# Altium PCB PCB_D1 mini AHT20 BMP150_2022-06-29.pcbdoc
Units mil, origin at the board's own origin, x right, y up, seen from the top; angles counter-clockwise.
Board outline 2302.5 x 2175 mil, 2 copper layers (Top Layer, Bottom Layer); 17 components, 27 nets, 76 pads, 4 vias.
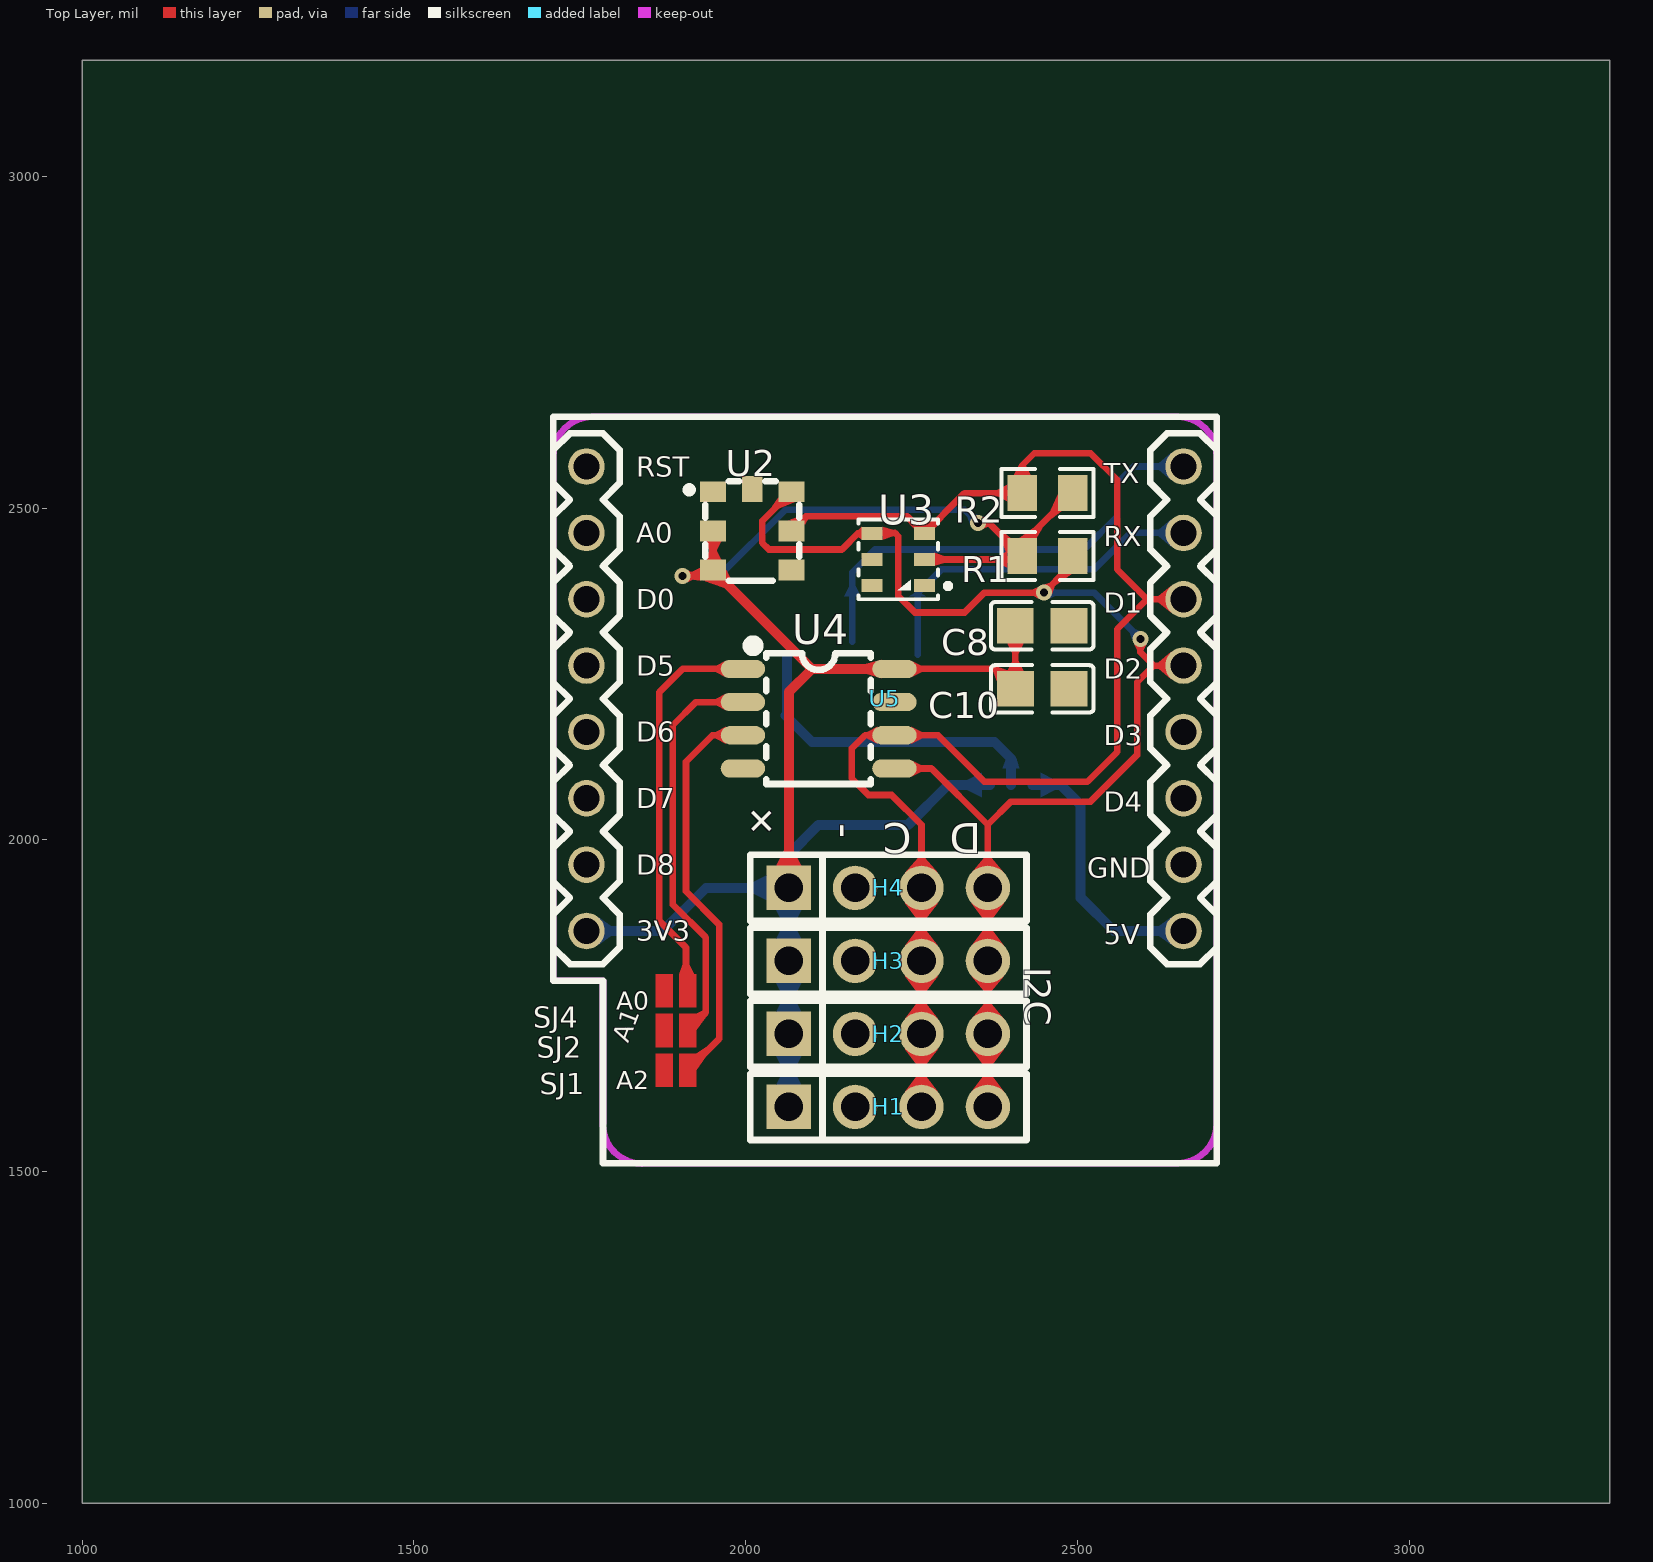
[diagram p0: Top Layer view]
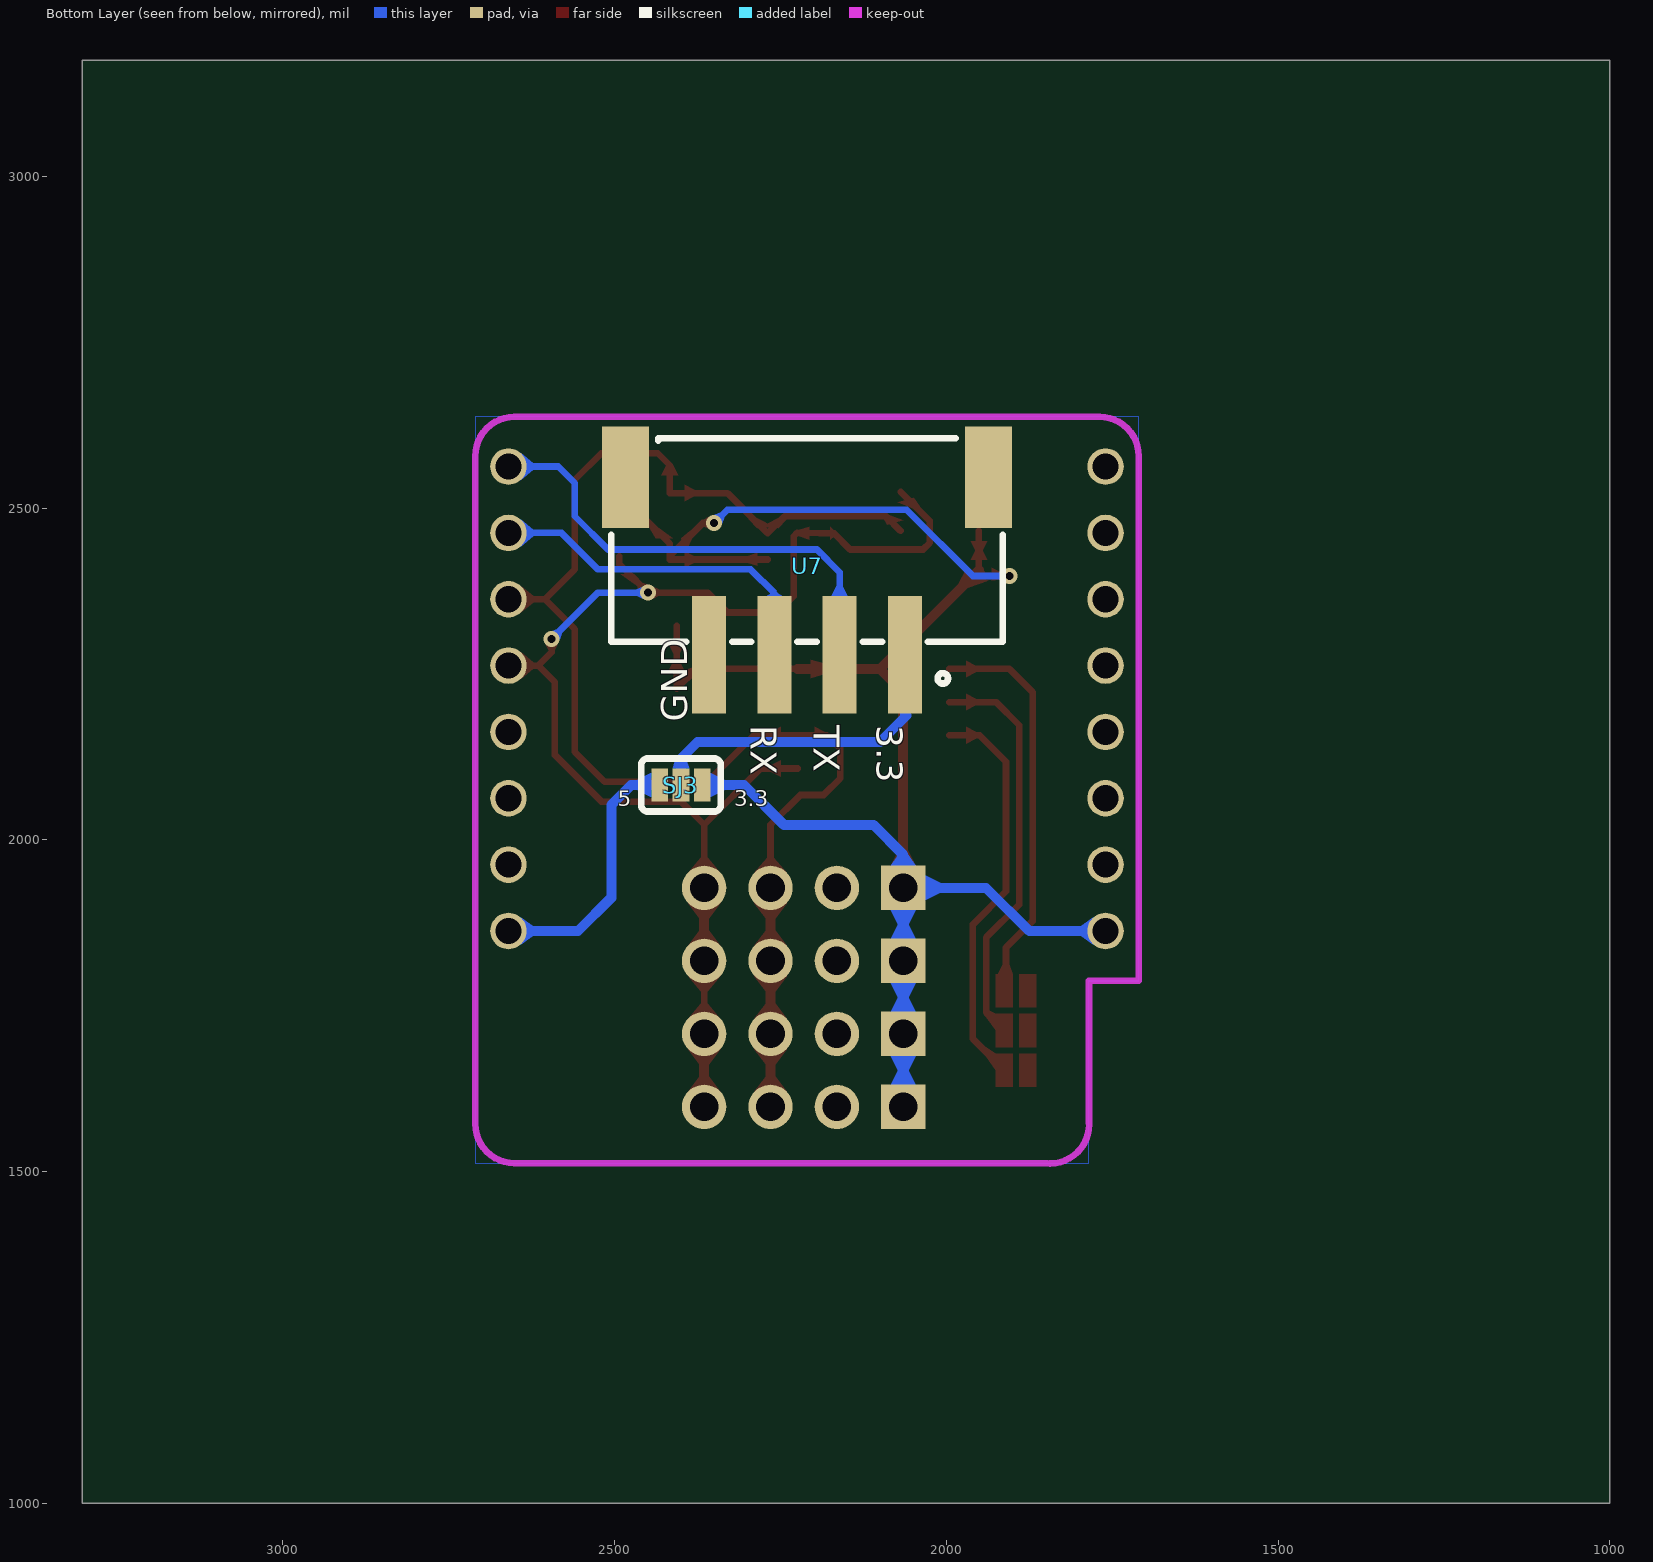
[diagram p1: Bottom Layer view, seen from below]

## Layer stack, top to bottom
Top Layer: signal copper (thickness not stored)
Dielectric: dielectric 12.6, FR-4, Dk 4.8
Bottom Layer: signal copper (thickness not stored)

## Board outline
3302.5,1000 1000,1000 1000,3175 3302.5,3175

## Components (designator, comment, footprint, x,y, rotation, side; value= is the part's Value field where it differs from the comment)
C8 "0.1u" C0805 2447.03,2322.5 r180 top
C10 "0.1u" C0805 2447.03,2227.5 r180 top
H1 "IO_EXT" HDR-TH_4P-P2.54-V-M 2215,1597.5 r0 top
H2 "IO_EXT" HDR-TH_4P-P2.54-V-M 2215,1707.5 r0 top
H3 "IO_EXT" HDR-TH_4P-P2.54-V-M 2215,1817.5 r0 top
H4 "IO_EXT" HDR-TH_4P-P2.54-V-M 2215,1927.5 r0 top
R1 "4.7K" R0805 2455,2427.5 r180 top
R2 "4.7K" R0805 2455,2522.5 r0 top
SJ1 "A2" PAD-JUMPER-2-NO_NO_SILK 1895,1652.5 r0 top
SJ2 "A1" PAD-JUMPER-2-NO_NO_SILK 1895,1712.5 r0 top
SJ3 "5V_IN_Jumpper" PAD-JUMPER-3-NO_YES_SILK 2400,2082.5 r0 bottom
SJ4 "A0" PAD-JUMPER-2-NO_NO_SILK 1895,1772.5 r0 top
U2 "BMP180" LGA-7_L3.8-W3.6-P1.50-BL 2010,2467.5 r270 top
U3 "AHT20_C2757850" SENSOR-SMD_L3.0-W3.0-P1.00-BR 2230,2422.5 r0 top
U4 "AT24C512C-SSHM-T" SOP-8_L5.0-W4.0-P1.27-LS6.2-BL 2110,2182.5 r270 top
U5 "WEMOS-D1-MINI-SHIELD" WEMOS-D1-MINI-SHIELD 2210,2087.5 r0 top
U7 "XH2.54-4PSMD" CONN-SMD_XH2.54-4PSMD 2210,2412.5 r180 bottom

## Footprints (in the part's own frame and the unit in brackets; to place one, negate y for a bottom-side part, rotate by r counter-clockwise, add the part's x,y. Pads: shape width x height; smd on the part's side, far side on the other; paste and mask are expansions set on the pad)
C0805 [mm]
  rect 1.41x1.35 smd: 1(-1.03,0) 2(1.03,0)
  silkscreen extent -1.96,-0.9 1.96,0.9
CONN-SMD_XH2.54-4PSMD [mm]
  rect 1.3x4.5 smd: 1(3.75,-3.4) 2(1.25,-3.4) 3(-1.25,-3.4) 4(-3.75,-3.4)
  rect 1.8x3.9 smd: 5(6.95,3.4) 6(-6.95,3.4)
  silkscreen extent -7.5,-4.5 7.5,4.9
HDR-TH_4P-P2.54-V-M [mm]
  rect 1.7x1.7 hole 1.1: 1(-3.81,0)
  round 1.7 hole 1.1: 2(-1.27,0) 3(1.27,0) 4(3.81,0)
  silkscreen extent -5.29,-1.27 5.29,1.27
LGA-7_L3.8-W3.6-P1.50-BL [mil]
  rect 31.5x39.4 smd: 1(-57,-59) 2(2,-59) 3(61,-59) 4(61,59) 5(2,59) 6(-57,59)
  rect 39.4x31.5 smd: 7(-61,0)
  silkscreen extent -73,-100 77,71
PAD-JUMPER-2-NO_NO_SILK [mil]
  round 0 smd: 1(-17.72,0) 2(17.72,0)
  Top Layer region: -30.22,25 -5.22,25 -5.22,-25 -30.22,-25
  Top Layer region: 5.22,25 30.22,25 30.22,-25 5.22,-25
PAD-JUMPER-3-NO_YES_SILK [mil]
  rect 25x50 smd: 1(32,0) 2(0,0) 3(-32,0)
  silkscreen extent -60,-40 60,40
R0805 [mil]
  rect 44.59x54.21 smd: 1(-38.04,0) 2(38.04,0)
  silkscreen extent -69,-36 69,36
SENSOR-SMD_L3.0-W3.0-P1.00-BR [mm]
  rect 0.8x0.5 smd: 1(1,-1) 2(1,0) 3(1,1) 4(-1,1) 5(-1,0) 6(-1,-1)
  silkscreen extent -1.52,-1.52 2.01,1.52
SOP-8_L5.0-W4.0-P1.27-LS6.2-BL [mm]
  oval 0.7x1.7 smd: 1(-1.905,-2.9) 2(-0.635,-2.9) 3(0.635,-2.9) 4(1.905,-2.9) 5(1.905,2.9) 6(0.635,2.9) 7(-0.635,2.9) 8(-1.905,2.9)
  silkscreen extent -2.99,-2.71 2.5,2
WEMOS-D1-MINI-SHIELD [mil]
  round 55.1 hole 39.4: JP1.1(-450,475) JP1.2(-450,375) JP1.3(-450,275) JP1.4(-450,175) JP1.5(-450,75) JP1.6(-450,-25) JP1.7(-450,-125) JP1.8(-450,-225) JP2.1(450,475) JP2.2(450,375) JP2.3(450,275) JP2.4(450,175) JP2.5(450,75) JP2.6(450,-25) JP2.7(450,-125) JP2.8(450,-225)
  silkscreen extent -500,-575 500,550

## Via types
v1: diameter 24, hole 12, Top Layer to Bottom Layer, tented both sides, 4 vias

## Nets (pads, with @x,y where several pads share a name; then routed paths per layer and width w, separated by ;. In a path a pad name is that pad's centre, name@x,y a point inside that pad or via, vN(x,y) a via of type N, cw(c..) or ccw(c..) an arc to the next point about the centre after c; other vN are vias at no path point)
3.3V: C8.2 C10.2 H1.1 H2.1 H3.1 H4.1 R1.2 R2.2 SJ3.3 U2.2 U2.3 U3.2 U4.8 U5.JP1.8 | length 2992.8
  Top Layer w10: v1(1905,2397.5) 1942,2397.5 U2.3 U2.2 ; U4.8 2376.5,2257.5 C10.2 C8.2 ; U3.2 2417,2422.5 R1.2 ; v1(2350,2477.5) 2367,2477.5 R1.2 ; R2.2 2417,2446.4 R1.2
  Top Layer w15: U2.3 2100,2257.5 ; H4.1 2065,2222.5 2100,2257.5 ; U4.8 2100,2257.5
  Bottom Layer w10: v1(1905,2397.5) 1960,2397.5 2060,2497.5 2330,2497.5 v1(2350,2477.5)
  Bottom Layer w15: U5.JP1.8 1875,1862.5 1940,1927.5 H4.1 ; H1.1@2065,1602.5 2065,1712.5 H3.1 H4.1 ; SJ3.3 2305,2082.5 2245,2022.5 2110,2022.5 2065,1977.5 H4.1
A0: SJ4.2 U4.1 | length 608
  Top Layer w10: SJ4.2 1910,1775.2 1910,1837.5 1870,1877.5 1870,2222.5 1905,2257.5 U4.1
A1: SJ2.2 U4.2 | length 612.3
  Top Layer w10: SJ2.2 1940,1739.8 1940,1852.5 1890,1902.5 1890,2172.5 1925,2207.5 U4.2
A2: SJ1.2 U4.3 | length 607.7
  Top Layer w10: SJ1.2 1960,1699.8 1960,1872.5 1910,1922.5 1910,2117.5 1950,2157.5 U4.3
GND: C8.1 C10.1 H1.2 H2.2 H3.2 H4.2 SJ1.1 SJ2.1 SJ4.1 U2.7 U3.5 U4.4 U4.7 U5.JP2.7 U7.4
S$151: 
SCL: H1.3 H2.3 H3.3 H4.3 R2.1 U2.5 U3.3 U4.6 U5.JP2.3 | length 2214
  Top Layer w10: U2.5 2091,2487.5 2243.7,2487.5 U3.3 2330,2522.5 R2.1 2417,2564.5 2435,2582.5 2520,2582.5 2560,2542.5 2560,2407.5 2605,2362.5 ; H4.3 2265,2022.5 2220,2067.5 2185,2067.5 2160,2092.5 2160,2137.5 2180,2157.5 U4.6 2290,2157.5 2360,2087.5 2515,2087.5 2560,2132.5 2560,2317.5 2605,2362.5 ; 2605,2362.5 U5.JP2.3 2605,2362.5
  Top Layer w15: H1.3@2265,1602.5 2265,1712.5 H3.3 H4.3
SDA: H1.4 H2.4 H3.4 H4.4 R1.1 U2.6 U3.4 U4.5 U5.JP2.4 | length 2139.3
  Top Layer w10: U2.6 2025,2480.5 2025,2447.5 2035,2437.5 2145,2437.5 2169.4,2461.9 U3.4 2225,2462.5 2230,2457.5 2230,2367.5 2255,2342.5 2330,2342.5 2360,2372.5 v1(2450,2372.5) 2493,2415.5 R1.1 ; U4.5 2280,2107.5 2365,2022.5 ; H2.4@2365,1712.5 H3.4 ; v1(2595,2302.5) 2595,2282.5 2615,2262.5 ; 2365,2022.5 2400,2057.5 2520,2057.5 2590,2127.5 2590,2237.5 2615,2262.5 ; 2365,2022.5 H4.4 2365,2022.5 ; 2615,2262.5 U5.JP2.4 2615,2262.5
  Top Layer w15: H1.4@2365,1602.5 H2.4@2365,1712.5 ; H3.4 H4.4
  Bottom Layer w10: v1(2450,2372.5) 2525,2372.5 v1(2595,2302.5)
U2_1: U2.1
U2_4: U2.4
U3_1: U3.1
U3_6: U3.6
U5_JP1.1: U5.JP1.1
U5_JP1.2: U5.JP1.2
U5_JP1.3: U5.JP1.3
U5_JP1.4: U5.JP1.4
U5_JP1.5: U5.JP1.5
U5_JP1.6: U5.JP1.6
U5_JP1.7: U5.JP1.7
U5_JP2.1: U5.JP2.1 U7.2 | length 699.1
  Bottom Layer w10: U7.2@2160.8,2298.6 2160.8,2403.3 2195,2437.5 2510,2437.5 2560,2487.5 2560,2537.5 2585,2562.5 U5.JP2.1
U5_JP2.2: U5.JP2.2 U7.3 | length 531.5
  Bottom Layer w10: U7.3 2259.2,2371.7 2295,2407.5 2525,2407.5 2580,2462.5 U5.JP2.2
U5_JP2.5: U5.JP2.5
U5_JP2.6: U5.JP2.6
U5_JP2.8: SJ3.1 U5.JP2.8 | length 401.1
  Bottom Layer w15: SJ3.1 2475,2082.5 2505,2052.5 2505,1912.5 2555,1862.5 U5.JP2.8
U7_5: U7.5
U7_6: U7.6
VOUT: SJ3.2 U7.1 | length 499
  Bottom Layer w15: U7.1 2062.4,2189.9 2060,2187.5 2100,2147.5 2375,2147.5 2400,2122.5 SJ3.2

## Polygon pours and split planes (outlines as drawn)
GND on Bottom Layer (solid): 2710,2637.5 2710,1512.5 1785,1512.5 1785,1787.5 1710,1787.5 1710,2637.5 2710,2637.5
GND on Top Layer (solid): 1785,1512.5 1785,1787.5 1710,1787.5 1710,2637.5 2710,2637.5 2710,1512.5 1785,1512.5

## Keep-outs
Keep-Out Layer:
  lines w10: 1710,2578.44 cw(c1769.05,2578.44) 1769.05,2637.5 ; 1784.68,1571.12 ccw(c1843.74,1571.12) 1843.74,1512.06 ; 2650.94,1512.5 ccw(c2650.94,1571.55) 2710,1571.55 ; 2650.94,2637.5 cw(c2650.94,2578.44) 2710,2578.44

## Other copper
Top Layer:
  region net SDA: 2641.78,2241.84 2641.78,2283.16 2622.49,2267.5 2622.49,2257.5
  region net SDA: 2641.78,2241.84 2641.78,2283.16 2622.49,2267.5 2622.49,2257.5
  region net SCL: 2641.78,2341.84 2641.78,2383.16 2622.49,2367.5 2622.49,2357.5
  region net SCL: 2641.78,2341.84 2641.78,2383.16 2622.49,2367.5 2622.49,2357.5
  region net SCL: 2290.1,1619.63 2239.9,1619.63 2257.5,1643.06 2272.5,1643.06
  region net SDA: 2390.1,1619.63 2339.9,1619.63 2357.5,1643.06 2372.5,1643.06
  region net SCL: 2290.1,1729.63 2239.9,1729.63 2257.5,1753.06 2272.5,1753.06
  region net SCL: 2290.1,1685.37 2239.9,1685.37 2257.5,1661.94 2272.5,1661.94
  region net SDA: 2390.1,1685.37 2339.9,1685.37 2357.5,1661.94 2372.5,1661.94
  region net SDA: 2390.1,1729.63 2339.9,1729.63 2360,1753.06 2370,1753.06
  region net SCL: 2290.1,1839.63 2239.9,1839.63 2257.5,1863.06 2272.5,1863.06
  region net SCL: 2290.1,1795.37 2239.9,1795.37 2257.5,1771.94 2272.5,1771.94
  region net SDA: 2390.1,1839.63 2339.9,1839.63 2357.5,1863.06 2372.5,1863.06
  region net SDA: 2390.1,1795.37 2339.9,1795.37 2360,1771.94 2370,1771.94
  region net SCL: 2290.1,1949.63 2239.9,1949.63 2260,1973.06 2270,1973.06
  region net SCL: 2290.1,1905.37 2239.9,1905.37 2257.5,1881.94 2272.5,1881.94
  region net SDA: 2390.1,1949.63 2339.9,1949.63 2360,1973.06 2370,1973.06
  region net SDA: 2390.1,1949.63 2339.9,1949.63 2360,1973.06 2370,1973.06
  region net SDA: 2390.1,1905.37 2339.9,1905.37 2357.5,1881.94 2372.5,1881.94
  region net SDA: 2586,2294.56 2604,2294.56 2600,2286.16 2590,2286.16
  region net SDA: 2442.06,2363.5 2442.06,2381.5 2433.66,2377.5 2433.66,2367.5
  region net SDA: 2461.98,2371.75 2449.25,2384.48 2458.02,2387.59 2465.09,2380.52
  region net 3.3V: 2357.94,2468.5 2357.94,2486.5 2366.34,2482.5 2366.34,2472.5
  region net 3.3V: 1912.94,2388.5 1912.94,2406.5 1921.34,2402.5 1921.34,2392.5
  region net 3.3V: 2418.98,2295.93 2393.98,2295.93 2401.48,2280.93 2411.48,2280.93
  region net 3.3V: 2378.73,2239.55 2399.07,2254.07 2381.26,2259.79 2373.01,2253.9
  region net 3.3V: 2393.98,2254.07 2418.98,2254.07 2411.48,2269.07 2401.48,2269.07
  region net 3.3V: 2046.25,1960.96 2083.75,1960.96 2072.5,1983.46 2057.5,1983.46
  region net 3.3V: 2394.66,2410 2394.66,2435 2379.66,2427.5 2379.66,2417.5
  region net 3.3V: 2394.66,2430.05 2399.33,2454.61 2386.12,2465.41 2383.86,2453.53
  region net 3.3V: 2412.64,2454.61 2437.64,2454.61 2447.22,2469.61 2433.07,2469.61
  region net SDA: 2470.75,2400.39 2490.39,2400.39 2469.97,2385.39 2455.82,2385.39
  region net 3.3V: 2475.41,2495.39 2470.75,2519.95 2459.94,2496.47 2462.2,2484.59
  region net SCL: 2429.46,2549.61 2404.46,2549.61 2411.96,2564.46 2421.96,2564.46
  region net SCL: 2394.66,2535 2394.66,2510 2379.66,2517.5 2379.66,2527.5
  region net 3.3V: 1963.5,2449.75 1938.5,2449.75 1946,2434.75 1956,2434.75
  region net 3.3V: 1970.7,2406.34 1936.6,2390.75 1966.99,2379.91 1981.54,2386.56
  region net 3.3V: 1931.3,2390.75 1931.3,2410 1916.3,2402.5 1916.3,2392.5
  region net 3.3V: 1938.5,2422.25 1963.5,2422.25 1956,2437.25 1946,2437.25
  region net SCL: 2064.65,2481.25 2088.7,2474.44 2094.54,2483.96 2085.49,2489.06
  region net SDA: 2073.35,2508.75 2049.3,2515.56 2040.03,2502.6 2051.05,2499.48
  region net 3.3V: 2285.12,2432.35 2285.12,2412.66 2300.12,2417.5 2300.12,2427.5
  region net SCL: 2260.22,2471.72 2285.12,2469.48 2297.96,2483.39 2284.98,2484.55
  region net SCL: 2253.62,2469.47 2278.52,2471.72 2253.77,2484.54 2240.8,2483.37
  region net SDA: 2206.38,2471.72 2206.38,2452.03 2221.38,2457.44 2221.38,2467.44
  region net SDA: 2174.88,2452.03 2174.88,2471.72 2169.37,2466.87 2169.37,2456.87
  region net A2: 1925.22,1677.5 1925.22,1652.52 1940.22,1672.95 1940.22,1687.09
  region net A1: 1925.22,1737.5 1925.22,1712.52 1940,1732.73 1936.46,1743.34
  region net A0: 1900.22,1797.5 1922.5,1797.5 1915,1812.5 1905,1812.5
  region net A0: 1970.35,2245 1970.35,2270 1955.35,2262.5 1955.35,2252.5
  region net A1: 1970.35,2195 1970.35,2220 1955.35,2212.5 1955.35,2202.5
  region net A2: 1970.35,2145 1970.35,2170 1955.35,2162.5 1955.35,2152.5
  region net 3.3V: 2204.49,2243.72 2204.49,2271.28 2181.99,2265 2181.99,2250
  region net 3.3V: 2249.66,2245 2249.66,2270 2264.66,2262.5 2264.66,2252.5
  region net SCL: 2198.69,2145 2198.69,2170 2183.69,2162.5 2183.69,2152.5
  region net SCL: 2249.66,2145 2249.66,2170 2264.66,2162.5 2264.66,2152.5
  region net SDA: 2249.66,2095 2249.66,2120 2264.66,2112.5 2264.66,2102.5
Bottom Layer:
  region net U5_JP2.2: 2641.78,2441.84 2641.78,2483.16 2622.49,2467.5 2622.49,2457.5
  region net U5_JP2.1: 2641.78,2541.84 2641.78,2583.16 2622.49,2567.5 2622.49,2557.5
  region net 3.3V: 1778.22,1841.84 1778.22,1883.16 1797.51,1870 1797.51,1855
  region net U5_JP2.8: 2641.78,1841.84 2641.78,1883.16 2622.49,1870 2622.49,1855
  region net SDA: 2595.75,2314.48 2583.02,2301.75 2579.91,2310.52 2586.98,2317.59
  region net SDA: 2457.94,2363.5 2457.94,2381.5 2466.34,2377.5 2466.34,2367.5
  region net 3.3V: 2350.75,2489.48 2338.02,2476.75 2334.91,2485.52 2341.98,2492.59
  region net 3.3V: 1912.94,2388.5 1912.94,2406.5 1921.34,2402.5 1921.34,2392.5
  region net 3.3V: 2046.25,1630.96 2083.75,1630.96 2072.5,1653.46 2057.5,1653.46
  region net 3.3V: 2083.75,1674.04 2046.25,1674.04 2057.5,1651.54 2072.5,1651.54
  region net 3.3V: 2046.25,1740.96 2083.75,1740.96 2072.5,1763.46 2057.5,1763.46
  region net 3.3V: 2083.75,1784.04 2046.25,1784.04 2057.5,1761.54 2072.5,1761.54
  region net 3.3V: 2046.25,1850.96 2083.75,1850.96 2072.5,1873.46 2057.5,1873.46
  region net 3.3V: 2046.25,1960.96 2083.75,1960.96 2072.5,1977.5 2057.5,1977.5
  region net 3.3V: 2083.75,1894.04 2046.25,1894.04 2057.5,1871.54 2072.5,1871.54
  region net 3.3V: 2031.54,1908.75 2031.54,1946.25 2009.04,1935 2009.04,1920
  region net U5_JP2.8: 2444.5,2063.75 2444.5,2101.25 2467,2090 2467,2075
  region net VOUT: 2412.5,2107.5 2387.5,2107.5 2392.5,2122.5 2407.5,2122.5
  region net 3.3V: 2355.5,2101.25 2355.5,2063.75 2333,2075 2333,2090
  region net VOUT: 2043.61,2190.06 2081.11,2190.06 2069.86,2189.86 2054.86,2189.86
  region net U5_JP2.1: 2173.3,2367.23 2148.3,2367.23 2155.8,2382.23 2165.8,2382.23
  region net U5_JP2.2: 2271.7,2367.23 2246.7,2367.23 2254.2,2371.7 2264.2,2371.7

## Silkscreen, mask and mechanical layers (free items; w line width, h text height)
Top Overlay:
  text "C" at 2250,2025 h45 r180
  text "D" at 2355,2025 h45 r180
  text "+" at 2055.91,2023.41 h45 r135
  text "-" at 2162.5,2002.5 h45 r90
  text "I2C" at 2420.32,1807.5 h39.37 r270
  text "A0" at 1805,1743.72 h27.56
  text "A1" at 1822.86,1692.56 h27.56 r69
  text "A2" at 1805,1623.72 h27.56
Bottom Overlay:
  text "GND" at 2390.32,2177.5 h39.37 r270
  text "3.3" at 2104.68,2172.5 h39.37 r90
  text "TX" at 2199.68,2172.5 h39.37 r90
  text "RX" at 2294.68,2172.5 h39.37 r90
  text "3.3" at 2320,2050.69 h23.62
  text "5" at 2495,2050.69 h23.62

## Text inside footprints (layer, text, board x,y; h text height)
U5: Top Overlay "D7" at 1835,2047.5 h30; Top Overlay "D5" at 1835,2247.5 h30; Top Overlay "D8" at 1835,1947.5 h30; Top Overlay "3V3" at 1835,1847.5 h30; Top Overlay "D0" at 1835,2347.5 h30; Top Overlay "A0" at 1835,2447.5 h30; Top Overlay "RST" at 1835,2547.5 h30; Top Overlay "TX" at 2540,2537.5 h30; Top Overlay "RX" at 2540,2442.5 h30; Top Overlay "D1" at 2540,2342.5 h30; Top Overlay "D2" at 2540,2242.5 h30; Top Overlay "D3" at 2540,2142.5 h30; Top Overlay "D4" at 2540,2042.5 h30; Top Overlay "GND" at 2515,1942.5 h30; Top Overlay "5V" at 2540,1842.5 h30; Top Overlay "D6" at 1835,2147.5 h30